# EAGLE board 04B-357-A1-01 (EAGLE 9.6.2)
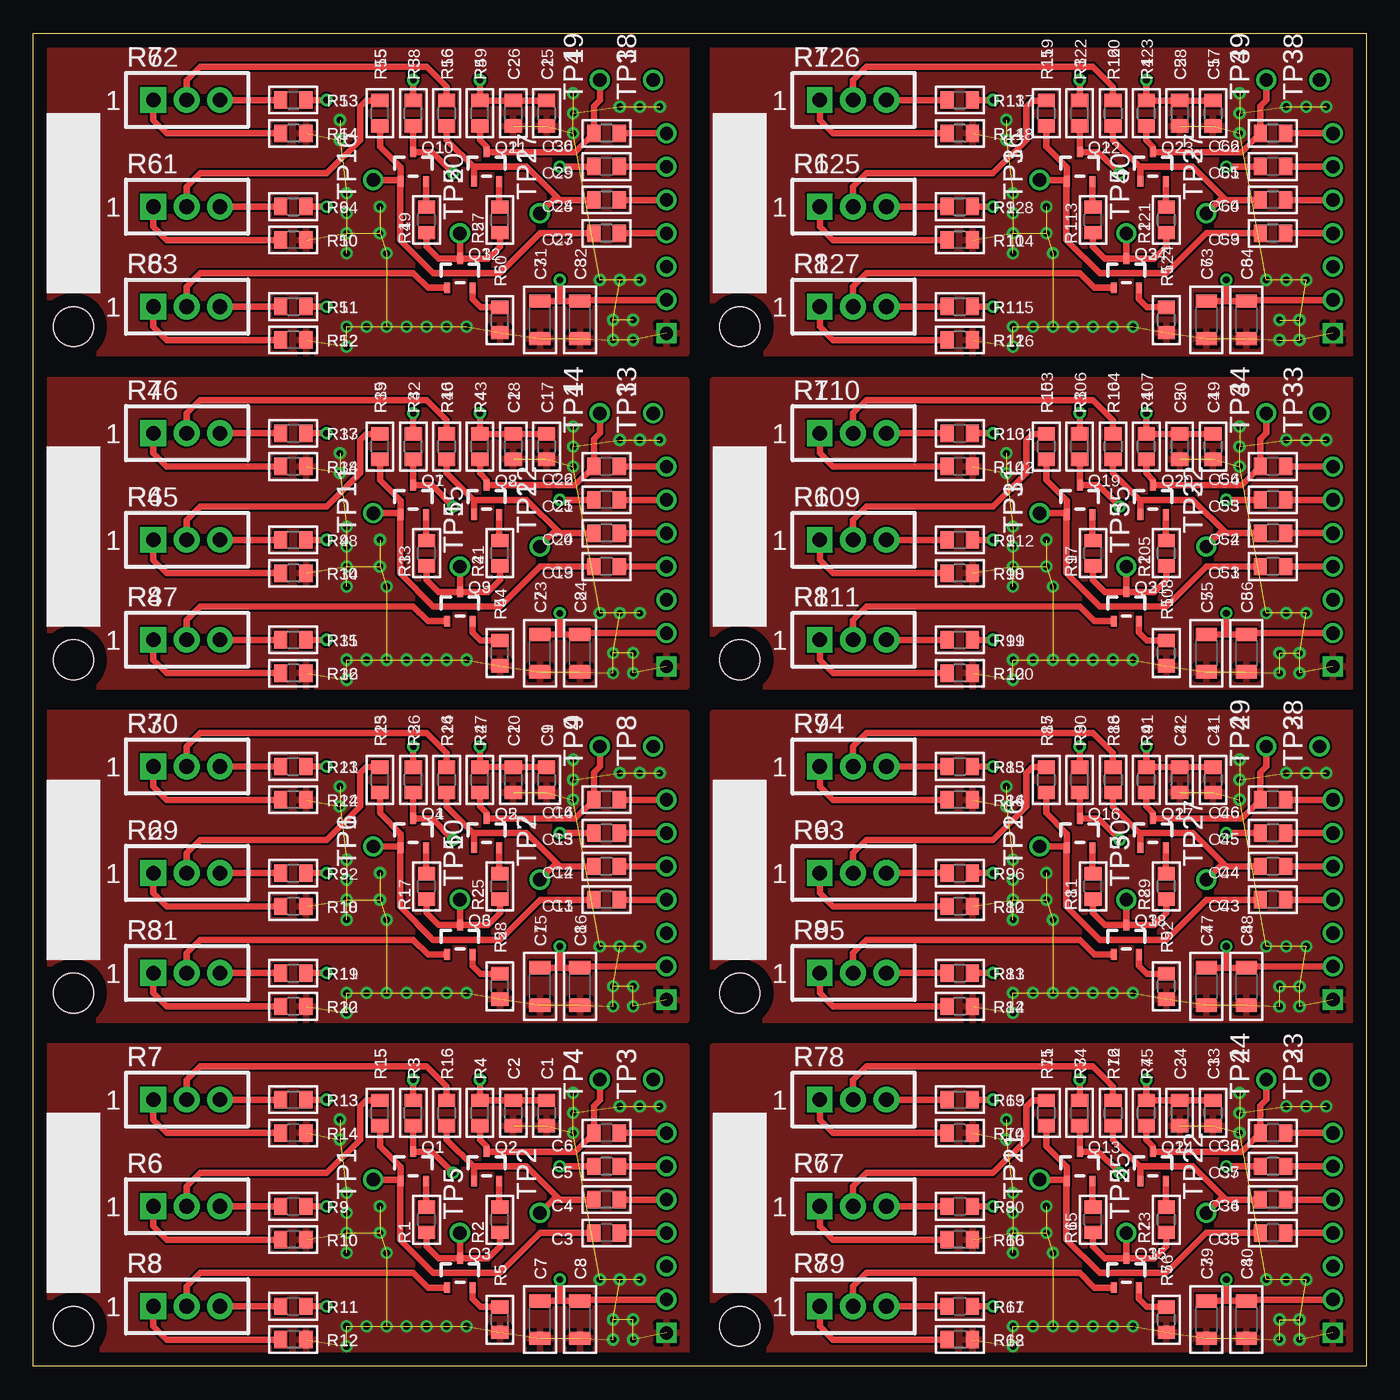
[diagram p0: board, top side]
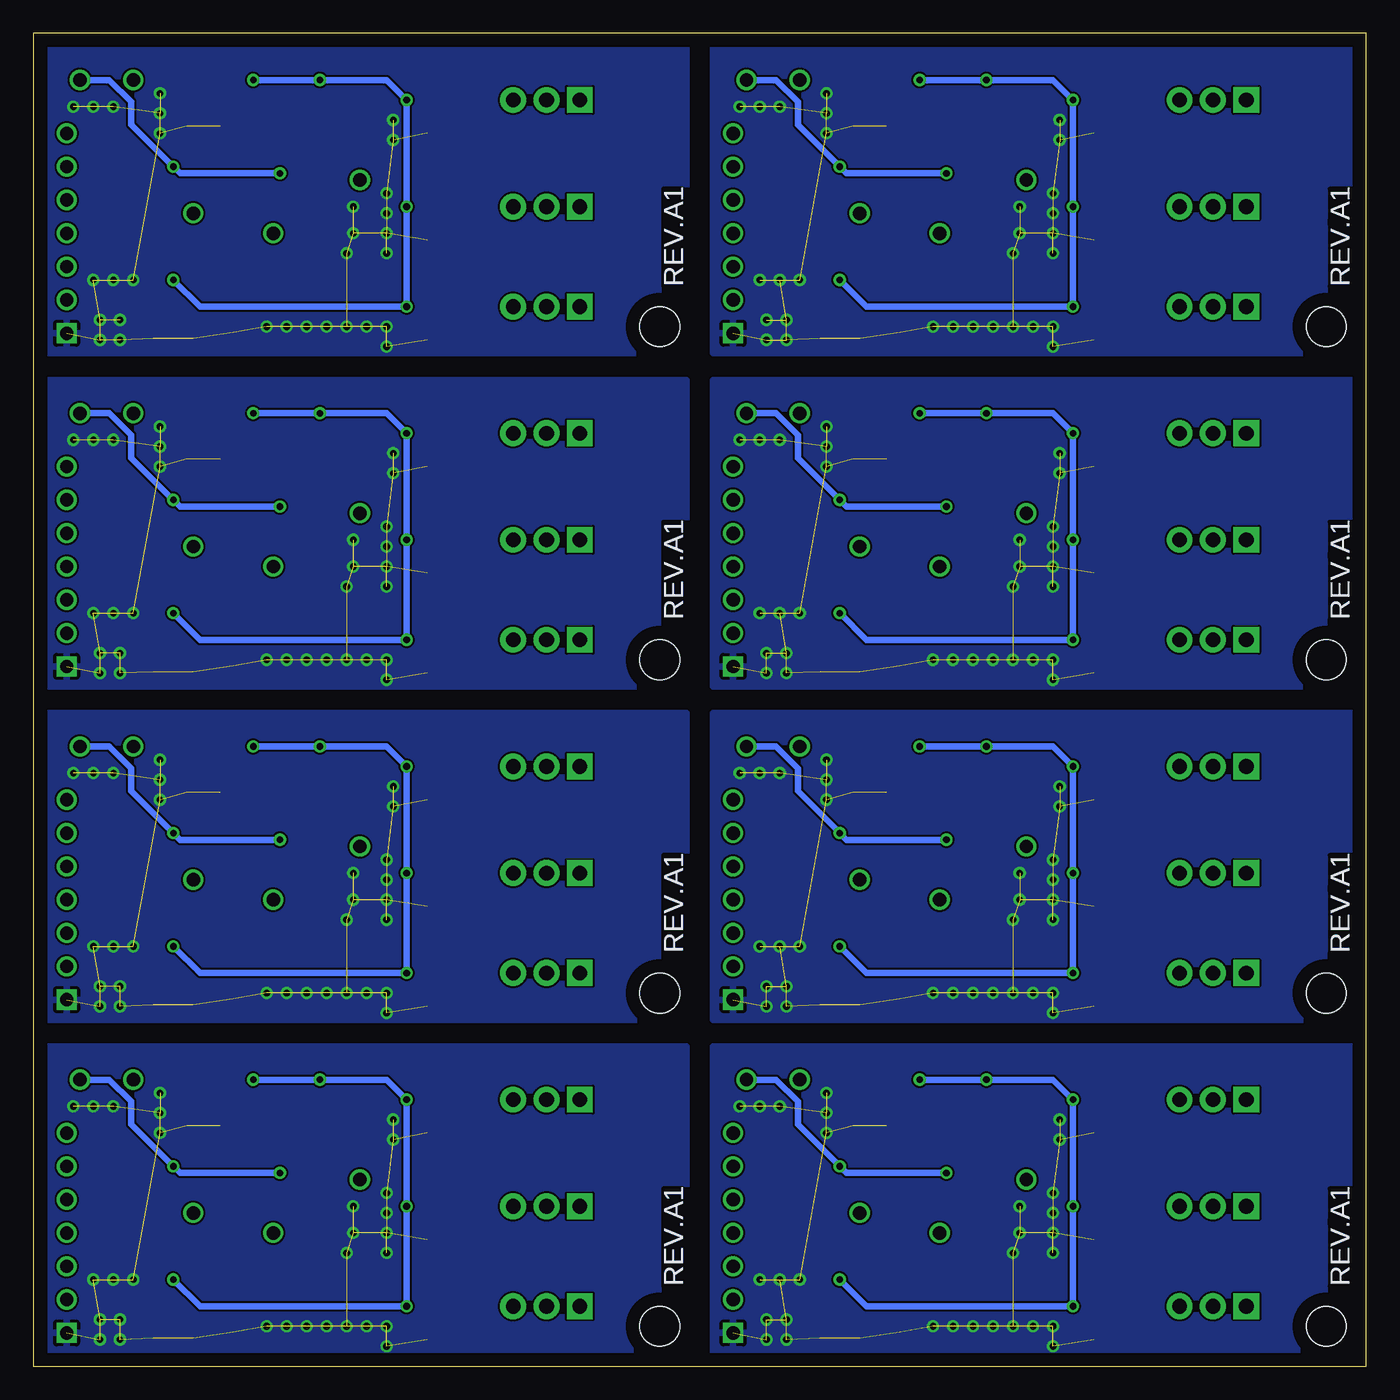
[diagram p1: board, bottom side, seen from below]

Size 100 x 100 mm. Coordinates in mm from the lower left corner, seen from the top.
Outline: 0,0 0,100 100,100 100,0 0,0
Copper layers (1*16): Top 0.035mm / dielectric 1.5mm / Bottom 0.035mm
Design rules "default": minimum track width 6mil, minimum drill 0.35mm, track to track 6mil, track to pad 6mil, pad to pad 6mil, via to via 6mil, smd to smd 6mil, copper to edge 40mil, drill to drill 6mil, minimum pad ring 10mil, minimum via ring 8mil, stop-mask expansion 4mil, vias tented up to drill 0mil, thermal gap 10mil

## Footprints (pad centres in the part's own frame; a part is rotated, then mirrored left to right if it is on the bottom)
C0805 = smd 1 x 1.3: 1 -0.95,0; 2 0.95,0
C1206 = smd 1 x 1.6: + -1.4,0; - 1.4,0
PINS_1X7 = drill 1 square: 1 0,0 | drill 1: 2 2.5,0; 3 5,0; 4 7.5,0; 5 10,0; 6 12.5,0; 7 15,0
MINIPCB_0P_25X50 = hole 3: 3,3
SOT23 = smd 0.45 x 0.8: 1 -0.95,-1.1; 2 0.95,-1.1; 3 0,1.1
R0805 = smd 1 x 1.3: 1 -0.95,0; 2 0.95,0
TRIM_0100 = drill 1.1 pad 1.93 square: 1 0,0 | drill 1.1 pad 1.93: 2 2.5,0; 3 5,0
PINS_1_TESTPOINT_KE5000_NOTEXT = drill 1: 1 0,0

## Placement (x,y rotation side)
C1  [C0805]  38.5,19 270 top
C2  [C0805]  36,19 270 top
C3  [C0805]  43,10 180 top
C4  [C0805]  43,12.5 180 top
C5  [C0805]  43,15 180 top
C6  [C0805]  43,17.5 180 top
C7  [C1206]  38,3.5 270 top
C8  [C1206]  41,3.5 270 top
C9  [C0805]  38.5,44 270 top
C10  [C0805]  36,44 270 top
C11  [C0805]  43,35 180 top
C12  [C0805]  43,37.5 180 top
C13  [C0805]  43,40 180 top
C14  [C0805]  43,42.5 180 top
C15  [C1206]  38,28.5 270 top
C16  [C1206]  41,28.5 270 top
C17  [C0805]  38.5,69 270 top
C18  [C0805]  36,69 270 top
C19  [C0805]  43,60 180 top
C20  [C0805]  43,62.5 180 top
C21  [C0805]  43,65 180 top
C22  [C0805]  43,67.5 180 top
C23  [C1206]  38,53.5 270 top
C24  [C1206]  41,53.5 270 top
C25  [C0805]  38.5,94 270 top
C26  [C0805]  36,94 270 top
C27  [C0805]  43,85 180 top
C28  [C0805]  43,87.5 180 top
C29  [C0805]  43,90 180 top
C30  [C0805]  43,92.5 180 top
C31  [C1206]  38,78.5 270 top
C32  [C1206]  41,78.5 270 top
C33  [C0805]  88.5,19 270 top
C34  [C0805]  86,19 270 top
C35  [C0805]  93,10 180 top
C36  [C0805]  93,12.5 180 top
C37  [C0805]  93,15 180 top
C38  [C0805]  93,17.5 180 top
C39  [C1206]  88,3.5 270 top
C40  [C1206]  91,3.5 270 top
C41  [C0805]  88.5,44 270 top
C42  [C0805]  86,44 270 top
C43  [C0805]  93,35 180 top
C44  [C0805]  93,37.5 180 top
C45  [C0805]  93,40 180 top
C46  [C0805]  93,42.5 180 top
C47  [C1206]  88,28.5 270 top
C48  [C1206]  91,28.5 270 top
C49  [C0805]  88.5,69 270 top
C50  [C0805]  86,69 270 top
C51  [C0805]  93,60 180 top
C52  [C0805]  93,62.5 180 top
C53  [C0805]  93,65 180 top
C54  [C0805]  93,67.5 180 top
C55  [C1206]  88,53.5 270 top
C56  [C1206]  91,53.5 270 top
C57  [C0805]  88.5,94 270 top
C58  [C0805]  86,94 270 top
C59  [C0805]  93,85 180 top
C60  [C0805]  93,87.5 180 top
C61  [C0805]  93,90 180 top
C62  [C0805]  93,92.5 180 top
C63  [C1206]  88,78.5 270 top
C64  [C1206]  91,78.5 270 top
P1  [PINS_1X7]  47.5,2.5 90 top
P2  [PINS_1X7]  47.5,27.5 90 top
P3  [PINS_1X7]  47.5,52.5 90 top
P4  [PINS_1X7]  47.5,77.5 90 top
P5  [PINS_1X7]  97.5,2.5 90 top
P6  [PINS_1X7]  97.5,27.5 90 top
P7  [PINS_1X7]  97.5,52.5 90 top
P8  [PINS_1X7]  97.5,77.5 90 top
PCB1  [MINIPCB_0P_25X50]  0,0 0 top
PCB2  [MINIPCB_0P_25X50]  0,25 0 top
PCB3  [MINIPCB_0P_25X50]  0,50 0 top
PCB4  [MINIPCB_0P_25X50]  0,75 0 top
PCB5  [MINIPCB_0P_25X50]  50,0 0 top
PCB6  [MINIPCB_0P_25X50]  50,25 0 top
PCB7  [MINIPCB_0P_25X50]  50,50 0 top
PCB8  [MINIPCB_0P_25X50]  50,75 0 top
Q1  [SOT23]  28.5,15 0 top
Q2  [SOT23]  34,15 0 top
Q3  [SOT23]  32,7 0 top
Q4  [SOT23]  28.5,40 0 top
Q5  [SOT23]  34,40 0 top
Q6  [SOT23]  32,32 0 top
Q7  [SOT23]  28.5,65 0 top
Q8  [SOT23]  34,65 0 top
Q9  [SOT23]  32,57 0 top
Q10  [SOT23]  28.5,90 0 top
Q11  [SOT23]  34,90 0 top
Q12  [SOT23]  32,82 0 top
Q13  [SOT23]  78.5,15 0 top
Q14  [SOT23]  84,15 0 top
Q15  [SOT23]  82,7 0 top
Q16  [SOT23]  78.5,40 0 top
Q17  [SOT23]  84,40 0 top
Q18  [SOT23]  82,32 0 top
Q19  [SOT23]  78.5,65 0 top
Q20  [SOT23]  84,65 0 top
Q21  [SOT23]  82,57 0 top
Q22  [SOT23]  78.5,90 0 top
Q23  [SOT23]  84,90 0 top
Q24  [SOT23]  82,82 0 top
R1  100  [R0805]  29.5,11 90 top
R2  100  [R0805]  35,11 90 top
R3  15k  [R0805]  28.5,19 90 top
R4  15k  [R0805]  33.5,19 90 top
R5  [R0805]  35,3.5 90 top
R6  [TRIM_0100]  9,12 0 top
R7  [TRIM_0100]  9,20 0 top
R8  [TRIM_0100]  9,4.5 0 top
R9  15k  [R0805]  19.5,12 0 top
R10  15k  [R0805]  19.5,9.5 180 top
R11  15k  [R0805]  19.5,4.5 0 top
R12  15k  [R0805]  19.5,2 180 top
R13  15k  [R0805]  19.5,20 0 top
R14  15k  [R0805]  19.5,17.5 180 top
R15  15k  [R0805]  26,19 90 top
R16  15k  [R0805]  31,19 270 top
R17  100  [R0805]  29.5,36 90 top
R18  15k  [R0805]  19.5,34.5 180 top
R19  15k  [R0805]  19.5,29.5 0 top
R20  15k  [R0805]  19.5,27 180 top
R21  15k  [R0805]  19.5,45 0 top
R22  15k  [R0805]  19.5,42.5 180 top
R23  15k  [R0805]  26,44 90 top
R24  15k  [R0805]  31,44 270 top
R25  100  [R0805]  35,36 90 top
R26  15k  [R0805]  28.5,44 90 top
R27  15k  [R0805]  33.5,44 90 top
R28  [R0805]  35,28.5 90 top
R29  [TRIM_0100]  9,37 0 top
R30  [TRIM_0100]  9,45 0 top
R31  [TRIM_0100]  9,29.5 0 top
R32  15k  [R0805]  19.5,37 0 top
R33  100  [R0805]  29.5,61 90 top
R34  15k  [R0805]  19.5,59.5 180 top
R35  15k  [R0805]  19.5,54.5 0 top
R36  15k  [R0805]  19.5,52 180 top
R37  15k  [R0805]  19.5,70 0 top
R38  15k  [R0805]  19.5,67.5 180 top
R39  15k  [R0805]  26,69 90 top
R40  15k  [R0805]  31,69 270 top
R41  100  [R0805]  35,61 90 top
R42  15k  [R0805]  28.5,69 90 top
R43  15k  [R0805]  33.5,69 90 top
R44  [R0805]  35,53.5 90 top
R45  [TRIM_0100]  9,62 0 top
R46  [TRIM_0100]  9,70 0 top
R47  [TRIM_0100]  9,54.5 0 top
R48  15k  [R0805]  19.5,62 0 top
R49  100  [R0805]  29.5,86 90 top
R50  15k  [R0805]  19.5,84.5 180 top
R51  15k  [R0805]  19.5,79.5 0 top
R52  15k  [R0805]  19.5,77 180 top
R53  15k  [R0805]  19.5,95 0 top
R54  15k  [R0805]  19.5,92.5 180 top
R55  15k  [R0805]  26,94 90 top
R56  15k  [R0805]  31,94 270 top
R57  100  [R0805]  35,86 90 top
R58  15k  [R0805]  28.5,94 90 top
R59  15k  [R0805]  33.5,94 90 top
R60  [R0805]  35,78.5 90 top
R61  [TRIM_0100]  9,87 0 top
R62  [TRIM_0100]  9,95 0 top
R63  [TRIM_0100]  9,79.5 0 top
R64  15k  [R0805]  19.5,87 0 top
R65  100  [R0805]  79.5,11 90 top
R66  15k  [R0805]  69.5,9.5 180 top
R67  15k  [R0805]  69.5,4.5 0 top
R68  15k  [R0805]  69.5,2 180 top
R69  15k  [R0805]  69.5,20 0 top
R70  15k  [R0805]  69.5,17.5 180 top
R71  15k  [R0805]  76,19 90 top
R72  15k  [R0805]  81,19 270 top
R73  100  [R0805]  85,11 90 top
R74  15k  [R0805]  78.5,19 90 top
R75  15k  [R0805]  83.5,19 90 top
R76  [R0805]  85,3.5 90 top
R77  [TRIM_0100]  59,12 0 top
R78  [TRIM_0100]  59,20 0 top
R79  [TRIM_0100]  59,4.5 0 top
R80  15k  [R0805]  69.5,12 0 top
R81  100  [R0805]  79.5,36 90 top
R82  15k  [R0805]  69.5,34.5 180 top
R83  15k  [R0805]  69.5,29.5 0 top
R84  15k  [R0805]  69.5,27 180 top
R85  15k  [R0805]  69.5,45 0 top
R86  15k  [R0805]  69.5,42.5 180 top
R87  15k  [R0805]  76,44 90 top
R88  15k  [R0805]  81,44 270 top
R89  100  [R0805]  85,36 90 top
R90  15k  [R0805]  78.5,44 90 top
R91  15k  [R0805]  83.5,44 90 top
R92  [R0805]  85,28.5 90 top
R93  [TRIM_0100]  59,37 0 top
R94  [TRIM_0100]  59,45 0 top
R95  [TRIM_0100]  59,29.5 0 top
R96  15k  [R0805]  69.5,37 0 top
R97  100  [R0805]  79.5,61 90 top
R98  15k  [R0805]  69.5,59.5 180 top
R99  15k  [R0805]  69.5,54.5 0 top
R100  15k  [R0805]  69.5,52 180 top
R101  15k  [R0805]  69.5,70 0 top
R102  15k  [R0805]  69.5,67.5 180 top
R103  15k  [R0805]  76,69 90 top
R104  15k  [R0805]  81,69 270 top
R105  100  [R0805]  85,61 90 top
R106  15k  [R0805]  78.5,69 90 top
R107  15k  [R0805]  83.5,69 90 top
R108  [R0805]  85,53.5 90 top
R109  [TRIM_0100]  59,62 0 top
R110  [TRIM_0100]  59,70 0 top
R111  [TRIM_0100]  59,54.5 0 top
R112  15k  [R0805]  69.5,62 0 top
R113  100  [R0805]  79.5,86 90 top
R114  15k  [R0805]  69.5,84.5 180 top
R115  15k  [R0805]  69.5,79.5 0 top
R116  15k  [R0805]  69.5,77 180 top
R117  15k  [R0805]  69.5,95 0 top
R118  15k  [R0805]  69.5,92.5 180 top
R119  15k  [R0805]  76,94 90 top
R120  15k  [R0805]  81,94 270 top
R121  100  [R0805]  85,86 90 top
R122  15k  [R0805]  78.5,94 90 top
R123  15k  [R0805]  83.5,94 90 top
R124  [R0805]  85,78.5 90 top
R125  [TRIM_0100]  59,87 0 top
R126  [TRIM_0100]  59,95 0 top
R127  [TRIM_0100]  59,79.5 0 top
R128  15k  [R0805]  69.5,87 0 top
TP1  [PINS_1_TESTPOINT_KE5000_NOTEXT]  25.5,14 90 top
TP2  [PINS_1_TESTPOINT_KE5000_NOTEXT]  38,11.5 0 top
TP3  [PINS_1_TESTPOINT_KE5000_NOTEXT]  46.5,21.5 90 top
TP4  [PINS_1_TESTPOINT_KE5000_NOTEXT]  42.5,21.5 90 top
TP5  [PINS_1_TESTPOINT_KE5000_NOTEXT]  32,10 90 top
TP6  [PINS_1_TESTPOINT_KE5000_NOTEXT]  25.5,39 90 top
TP7  [PINS_1_TESTPOINT_KE5000_NOTEXT]  38,36.5 0 top
TP8  [PINS_1_TESTPOINT_KE5000_NOTEXT]  46.5,46.5 90 top
TP9  [PINS_1_TESTPOINT_KE5000_NOTEXT]  42.5,46.5 90 top
TP10  [PINS_1_TESTPOINT_KE5000_NOTEXT]  32,35 90 top
TP11  [PINS_1_TESTPOINT_KE5000_NOTEXT]  25.5,64 90 top
TP12  [PINS_1_TESTPOINT_KE5000_NOTEXT]  38,61.5 0 top
TP13  [PINS_1_TESTPOINT_KE5000_NOTEXT]  46.5,71.5 90 top
TP14  [PINS_1_TESTPOINT_KE5000_NOTEXT]  42.5,71.5 90 top
TP15  [PINS_1_TESTPOINT_KE5000_NOTEXT]  32,60 90 top
TP16  [PINS_1_TESTPOINT_KE5000_NOTEXT]  25.5,89 90 top
TP17  [PINS_1_TESTPOINT_KE5000_NOTEXT]  38,86.5 0 top
TP18  [PINS_1_TESTPOINT_KE5000_NOTEXT]  46.5,96.5 90 top
TP19  [PINS_1_TESTPOINT_KE5000_NOTEXT]  42.5,96.5 90 top
TP20  [PINS_1_TESTPOINT_KE5000_NOTEXT]  32,85 90 top
TP21  [PINS_1_TESTPOINT_KE5000_NOTEXT]  75.5,14 90 top
TP22  [PINS_1_TESTPOINT_KE5000_NOTEXT]  88,11.5 0 top
TP23  [PINS_1_TESTPOINT_KE5000_NOTEXT]  96.5,21.5 90 top
TP24  [PINS_1_TESTPOINT_KE5000_NOTEXT]  92.5,21.5 90 top
TP25  [PINS_1_TESTPOINT_KE5000_NOTEXT]  82,10 90 top
TP26  [PINS_1_TESTPOINT_KE5000_NOTEXT]  75.5,39 90 top
TP27  [PINS_1_TESTPOINT_KE5000_NOTEXT]  88,36.5 0 top
TP28  [PINS_1_TESTPOINT_KE5000_NOTEXT]  96.5,46.5 90 top
TP29  [PINS_1_TESTPOINT_KE5000_NOTEXT]  92.5,46.5 90 top
TP30  [PINS_1_TESTPOINT_KE5000_NOTEXT]  82,35 90 top
TP31  [PINS_1_TESTPOINT_KE5000_NOTEXT]  75.5,64 90 top
TP32  [PINS_1_TESTPOINT_KE5000_NOTEXT]  88,61.5 0 top
TP33  [PINS_1_TESTPOINT_KE5000_NOTEXT]  96.5,71.5 90 top
TP34  [PINS_1_TESTPOINT_KE5000_NOTEXT]  92.5,71.5 90 top
TP35  [PINS_1_TESTPOINT_KE5000_NOTEXT]  82,60 90 top
TP36  [PINS_1_TESTPOINT_KE5000_NOTEXT]  75.5,89 90 top
TP37  [PINS_1_TESTPOINT_KE5000_NOTEXT]  88,86.5 0 top
TP38  [PINS_1_TESTPOINT_KE5000_NOTEXT]  96.5,96.5 90 top
TP39  [PINS_1_TESTPOINT_KE5000_NOTEXT]  92.5,96.5 90 top
TP40  [PINS_1_TESTPOINT_KE5000_NOTEXT]  82,85 90 top

## Library data of the parts
C1-C64 P1-P8 Q1-Q24 R1-R128 TP1-TP40 = minipcb
PCB1-PCB8 = minipcb; REVISION: A1

## Nets
GND: C1.2 C2.2 C7.- C8.- P1.1 R5.1 R10.1 R12.1 R14.1
GND1: C9.2 C10.2 C15.- C16.- P2.1 R18.1 R20.1 R22.1 R28.1
GND2: C17.2 C18.2 C23.- C24.- P3.1 R34.1 R36.1 R38.1 R44.1
GND3: C25.2 C26.2 C31.- C32.- P4.1 R50.1 R52.1 R54.1 R60.1
GND4: C33.2 C34.2 C39.- C40.- P5.1 R66.1 R68.1 R70.1 R76.1
GND5: C41.2 C42.2 C47.- C48.- P6.1 R82.1 R84.1 R86.1 R92.1
GND6: C49.2 C50.2 C55.- C56.- P7.1 R98.1 R100.1 R102.1 R108.1
GND7: C57.2 C58.2 C63.- C64.- P8.1 R114.1 R116.1 R118.1 R124.1
N$1: Q3.3 R1.1 R2.1 TP5.1
N$2: C5.2 Q1.3 R3.1 TP3.1
N$3: Q1.2 R1.2
N$4: Q2.2 R2.2
N$5: C6.2 Q2.3 R4.1 TP4.1
N$6: Q3.2 R5.2
N$7: R8.3 R11.1
N$8: R8.1 R12.2
N$9: Q3.1 R8.2
N$10: C3.2 Q1.1 R15.1 TP1.1
N$11: C4.2 Q2.1 R16.2 TP2.1
N$12: R7.3 R13.1
N$13: R7.1 R14.2
N$14: R6.3 R9.1
N$15: R6.1 R10.2
N$16: R6.2 R15.2
N$17: R7.2 R16.1
N$18: C3.1 P1.4
N$19: C4.1 P1.5
N$20: C5.1 P1.6
N$21: C6.1 P1.7
N$22: Q6.3 R17.1 R25.1 TP10.1
N$23: C13.2 Q4.3 R26.1 TP8.1
N$24: Q4.2 R17.2
N$25: Q5.2 R25.2
N$26: C14.2 Q5.3 R27.1 TP9.1
N$27: Q6.2 R28.2
N$28: R19.1 R31.3
N$29: R20.2 R31.1
N$30: Q6.1 R31.2
N$31: C11.2 Q4.1 R23.1 TP6.1
N$32: C12.2 Q5.1 R24.2 TP7.1
N$33: R21.1 R30.3
N$34: R22.2 R30.1
N$35: R29.3 R32.1
N$36: R18.2 R29.1
N$37: R23.2 R29.2
N$38: R24.1 R30.2
N$39: C11.1 P2.4
N$40: C12.1 P2.5
N$41: C13.1 P2.6
N$42: C14.1 P2.7
N$43: Q9.3 R33.1 R41.1 TP15.1
N$44: C21.2 Q7.3 R42.1 TP13.1
N$45: Q7.2 R33.2
N$46: Q8.2 R41.2
N$47: C22.2 Q8.3 R43.1 TP14.1
N$48: Q9.2 R44.2
N$49: R35.1 R47.3
N$50: R36.2 R47.1
N$51: Q9.1 R47.2
N$52: C19.2 Q7.1 R39.1 TP11.1
N$53: C20.2 Q8.1 R40.2 TP12.1
N$54: R37.1 R46.3
N$55: R38.2 R46.1
N$56: R45.3 R48.1
N$57: R34.2 R45.1
N$58: R39.2 R45.2
N$59: R40.1 R46.2
N$60: C19.1 P3.4
N$61: C20.1 P3.5
N$62: C21.1 P3.6
N$63: C22.1 P3.7
N$64: Q12.3 R49.1 R57.1 TP20.1
N$65: C29.2 Q10.3 R58.1 TP18.1
N$66: Q10.2 R49.2
N$67: Q11.2 R57.2
N$68: C30.2 Q11.3 R59.1 TP19.1
N$69: Q12.2 R60.2
N$70: R51.1 R63.3
N$71: R52.2 R63.1
N$72: Q12.1 R63.2
N$73: C27.2 Q10.1 R55.1 TP16.1
N$74: C28.2 Q11.1 R56.2 TP17.1
N$75: R53.1 R62.3
N$76: R54.2 R62.1
N$77: R61.3 R64.1
N$78: R50.2 R61.1
N$79: R55.2 R61.2
N$80: R56.1 R62.2
N$81: C27.1 P4.4
N$82: C28.1 P4.5
N$83: C29.1 P4.6
N$84: C30.1 P4.7
N$85: Q15.3 R65.1 R73.1 TP25.1
N$86: C37.2 Q13.3 R74.1 TP23.1
N$87: Q13.2 R65.2
N$88: Q14.2 R73.2
N$89: C38.2 Q14.3 R75.1 TP24.1
N$90: Q15.2 R76.2
N$91: R67.1 R79.3
N$92: R68.2 R79.1
N$93: Q15.1 R79.2
N$94: C35.2 Q13.1 R71.1 TP21.1
N$95: C36.2 Q14.1 R72.2 TP22.1
N$96: R69.1 R78.3
N$97: R70.2 R78.1
N$98: R77.3 R80.1
N$99: R66.2 R77.1
N$100: R71.2 R77.2
N$101: R72.1 R78.2
N$102: C35.1 P5.4
N$103: C36.1 P5.5
N$104: C37.1 P5.6
N$105: C38.1 P5.7
N$106: Q18.3 R81.1 R89.1 TP30.1
N$107: C45.2 Q16.3 R90.1 TP28.1
N$108: Q16.2 R81.2
N$109: Q17.2 R89.2
N$110: C46.2 Q17.3 R91.1 TP29.1
N$111: Q18.2 R92.2
N$112: R83.1 R95.3
N$113: R84.2 R95.1
N$114: Q18.1 R95.2
N$115: C43.2 Q16.1 R87.1 TP26.1
N$116: C44.2 Q17.1 R88.2 TP27.1
N$117: R85.1 R94.3
N$118: R86.2 R94.1
N$119: R93.3 R96.1
N$120: R82.2 R93.1
N$121: R87.2 R93.2
N$122: R88.1 R94.2
N$123: C43.1 P6.4
N$124: C44.1 P6.5
N$125: C45.1 P6.6
N$126: C46.1 P6.7
N$127: Q21.3 R97.1 R105.1 TP35.1
N$128: C53.2 Q19.3 R106.1 TP33.1
N$129: Q19.2 R97.2
N$130: Q20.2 R105.2
N$131: C54.2 Q20.3 R107.1 TP34.1
N$132: Q21.2 R108.2
N$133: R99.1 R111.3
N$134: R100.2 R111.1
N$135: Q21.1 R111.2
N$136: C51.2 Q19.1 R103.1 TP31.1
N$137: C52.2 Q20.1 R104.2 TP32.1
N$138: R101.1 R110.3
N$139: R102.2 R110.1
N$140: R109.3 R112.1
N$141: R98.2 R109.1
N$142: R103.2 R109.2
N$143: R104.1 R110.2
N$144: C51.1 P7.4
N$145: C52.1 P7.5
N$146: C53.1 P7.6
N$147: C54.1 P7.7
N$148: Q24.3 R113.1 R121.1 TP40.1
N$149: C61.2 Q22.3 R122.1 TP38.1
N$150: Q22.2 R113.2
N$151: Q23.2 R121.2
N$152: C62.2 Q23.3 R123.1 TP39.1
N$153: Q24.2 R124.2
N$154: R115.1 R127.3
N$155: R116.2 R127.1
N$156: Q24.1 R127.2
N$157: C59.2 Q22.1 R119.1 TP36.1
N$158: C60.2 Q23.1 R120.2 TP37.1
N$159: R117.1 R126.3
N$160: R118.2 R126.1
N$161: R125.3 R128.1
N$162: R114.2 R125.1
N$163: R119.2 R125.2
N$164: R120.1 R126.2
N$165: C59.1 P8.4
N$166: C60.1 P8.5
N$167: C61.1 P8.6
N$168: C62.1 P8.7
V+: C1.1 C2.1 C7.+ C8.+ P1.2 R3.2 R4.2 R9.2 R11.2 R13.2
V+1: C9.1 C10.1 C15.+ C16.+ P2.2 R19.2 R21.2 R26.2 R27.2 R32.2
V+2: C17.1 C18.1 C23.+ C24.+ P3.2 R35.2 R37.2 R42.2 R43.2 R48.2
V+3: C25.1 C26.1 C31.+ C32.+ P4.2 R51.2 R53.2 R58.2 R59.2 R64.2
V+4: C33.1 C34.1 C39.+ C40.+ P5.2 R67.2 R69.2 R74.2 R75.2 R80.2
V+5: C41.1 C42.1 C47.+ C48.+ P6.2 R83.2 R85.2 R90.2 R91.2 R96.2
V+6: C49.1 C50.1 C55.+ C56.+ P7.2 R99.2 R101.2 R106.2 R107.2 R112.2
V+7: C57.1 C58.1 C63.+ C64.+ P8.2 R115.2 R117.2 R122.2 R123.2 R128.2

## Tracks (layer width: path | path; a pad name or v marks a point on that pad's centre or on a via)
GND  (via drill 0.5)  (38 unrouted)
  other vias: 40.5,17.5 40.5,19 40.5,20.5 23,18.5 23,17 23.5,11.5 23.5,10 23.5,8.5 23.5,3 23.5,1.5 25,3 26.5,3 28,3 29.5,3 31,3 32.5,3 43.5,3.5 43.5,2 45,3.5 45,2 45.5,6.5 44,6.5 42.5,6.5 26,12 26,10 26.5,8.5 23.5,13 44,19.5 45.5,19.5 47,19.5
  pour Top: 1,1 49,1 49,24 1,24
  pour Bottom: 1,1 49,1 49,24 1,24
GND1  (via drill 0.5)  (38 unrouted)
  other vias: 40.5,42.5 40.5,44 40.5,45.5 23,43.5 23,42 23.5,36.5 23.5,35 23.5,33.5 23.5,28 23.5,26.5 25,28 26.5,28 28,28 29.5,28 31,28 32.5,28 43.5,28.5 43.5,27 45,28.5 45,27 45.5,31.5 44,31.5 42.5,31.5 26,37 26,35 26.5,33.5 23.5,38 44,44.5 45.5,44.5 47,44.5
  pour Top: 1,26 49,26 49,49 1,49
  pour Bottom: 1,26 49,26 49,49 1,49
GND2  (via drill 0.5)  (38 unrouted)
  other vias: 40.5,67.5 40.5,69 40.5,70.5 23,68.5 23,67 23.5,61.5 23.5,60 23.5,58.5 23.5,53 23.5,51.5 25,53 26.5,53 28,53 29.5,53 31,53 32.5,53 43.5,53.5 43.5,52 45,53.5 45,52 45.5,56.5 44,56.5 42.5,56.5 26,62 26,60 26.5,58.5 23.5,63 44,69.5 45.5,69.5 47,69.5
  pour Top: 1,51 49,51 49,74 1,74
  pour Bottom: 1,51 49,51 49,74 1,74
GND3  (via drill 0.5)  (38 unrouted)
  other vias: 40.5,92.5 40.5,94 40.5,95.5 23,93.5 23,92 23.5,86.5 23.5,85 23.5,83.5 23.5,78 23.5,76.5 25,78 26.5,78 28,78 29.5,78 31,78 32.5,78 43.5,78.5 43.5,77 45,78.5 45,77 45.5,81.5 44,81.5 42.5,81.5 26,87 26,85 26.5,83.5 23.5,88 44,94.5 45.5,94.5 47,94.5
  pour Top: 1,76 49,76 49,99 1,99
  pour Bottom: 1,76 49,76 49,99 1,99
GND4  (via drill 0.5)  (38 unrouted)
  other vias: 90.5,17.5 90.5,19 90.5,20.5 73,18.5 73,17 73.5,11.5 73.5,10 73.5,8.5 73.5,3 73.5,1.5 75,3 76.5,3 78,3 79.5,3 81,3 82.5,3 93.5,3.5 93.5,2 95,3.5 95,2 95.5,6.5 94,6.5 92.5,6.5 76,12 76,10 76.5,8.5 73.5,13 94,19.5 95.5,19.5 97,19.5
  pour Top: 51,1 99,1 99,24 51,24
  pour Bottom: 51,1 99,1 99,24 51,24
GND5  (via drill 0.5)  (38 unrouted)
  other vias: 90.5,42.5 90.5,44 90.5,45.5 73,43.5 73,42 73.5,36.5 73.5,35 73.5,33.5 73.5,28 73.5,26.5 75,28 76.5,28 78,28 79.5,28 81,28 82.5,28 93.5,28.5 93.5,27 95,28.5 95,27 95.5,31.5 94,31.5 92.5,31.5 76,37 76,35 76.5,33.5 73.5,38 94,44.5 95.5,44.5 97,44.5
  pour Top: 51,26 99,26 99,49 51,49
  pour Bottom: 51,26 99,26 99,49 51,49
GND6  (via drill 0.5)  (38 unrouted)
  other vias: 90.5,67.5 90.5,69 90.5,70.5 73,68.5 73,67 73.5,61.5 73.5,60 73.5,58.5 73.5,53 73.5,51.5 75,53 76.5,53 78,53 79.5,53 81,53 82.5,53 93.5,53.5 93.5,52 95,53.5 95,52 95.5,56.5 94,56.5 92.5,56.5 76,62 76,60 76.5,58.5 73.5,63 94,69.5 95.5,69.5 97,69.5
  pour Top: 51,51 99,51 99,74 51,74
  pour Bottom: 51,51 99,51 99,74 51,74
GND7  (via drill 0.5)  (38 unrouted)
  other vias: 90.5,92.5 90.5,94 90.5,95.5 73,93.5 73,92 73.5,86.5 73.5,85 73.5,83.5 73.5,78 73.5,76.5 75,78 76.5,78 78,78 79.5,78 81,78 82.5,78 93.5,78.5 93.5,77 95,78.5 95,77 95.5,81.5 94,81.5 92.5,81.5 76,87 76,85 76.5,83.5 73.5,88 94,94.5 95.5,94.5 97,94.5
  pour Top: 51,76 99,76 99,99 51,99
  pour Bottom: 51,76 99,76 99,99 51,99
N$1
  Top 0.5: R1.1 29.5,9 30.4,8.1 Q3.3 | R2.1 35,9 34.1,8.1 Q3.3 | Q3.3 TP5.1
N$2  (via drill 0.5)
  Top 0.5: R3.1 Q1.3 29.9,16.1 v31.5,14.5 | C5.2 v39.5,15
  Bottom 0.5: v31.5,14.5 39,14.5 v39.5,15 42.64,18.14 42.64,19.85 44.29,21.5 TP3.1
N$3
  Top 0.5: R1.2 29.45,12 Q1.2
N$4
  Top 0.5: R2.2 34.95,12 Q2.2
N$5
  Top 0.5: R4.1 33.5,17 34,16.5 Q2.3 40.65,16.1 C6.2 42.05,19.55 42.5,20 TP4.1
N$6
  Top 0.5: Q3.2 32.95,5.05 33.55,4.45 R5.2
N$7
  Top 0.5: R11.1 R8.3
N$8
  Top 0.5: R12.2 10,2 9,3 R8.1
N$9
  Top 0.5: R8.2 11.5,6 12.5,7 28.5,7 29.6,5.9 Q3.1
N$10
  Top 0.5: R15.1 26,16.5 27.55,14.95 Q1.1 27.5,13.85 | C3.2 38,10 35,7 30,7 27.5,9.5 27.5,13.85 | TP1.1 27.35,14 27.5,13.85
N$11
  Top 0.5: Q2.1 33.05,14.95 | R16.2 31,17 33.05,14.95 | C4.2 39.5,12.5 | 39.5,12.5 37,15 33.1,15 33.05,14.95 | TP2.1 39,12.5 39.5,12.5
N$12
  Top 0.5: R7.3 R13.1
N$13
  Top 0.5: R14.2 10,17.5 9,18.5 R7.1
N$14
  Top 0.5: R6.3 R9.1
N$15
  Top 0.5: R10.2 10,9.5 9,10.5 R6.1
N$16
  Top 0.5: R6.2 11.5,13.5 12.5,14.5 22,14.5 24.5,17 24.5,19.5 24.95,19.95 R15.2
N$17
  Top 0.5: R7.2 11.5,21.5 12.5,22.5 29.5,22.5 31,21 R16.1
N$18
  Top 0.5: C3.1 P1.4
N$19
  Top 0.5: C4.1 P1.5
N$20
  Top 0.5: C5.1 P1.6
N$21
  Top 0.5: C6.1 P1.7
N$22
  Top 0.5: R17.1 29.5,34 30.4,33.1 Q6.3 | R25.1 35,34 34.1,33.1 Q6.3 | Q6.3 TP10.1
N$23  (via drill 0.5)
  Top 0.5: R26.1 Q4.3 29.9,41.1 v31.5,39.5 | C13.2 v39.5,40
  Bottom 0.5: v31.5,39.5 39,39.5 v39.5,40 42.64,43.14 42.64,44.85 44.29,46.5 TP8.1
N$24
  Top 0.5: R17.2 29.45,37 Q4.2
N$25
  Top 0.5: R25.2 34.95,37 Q5.2
N$26
  Top 0.5: R27.1 33.5,42 34,41.5 Q5.3 40.65,41.1 C14.2 42.05,44.55 42.5,45 TP9.1
N$27
  Top 0.5: Q6.2 32.95,30.05 33.55,29.45 R28.2
N$28
  Top 0.5: R19.1 R31.3
N$29
  Top 0.5: R20.2 10,27 9,28 R31.1
N$30
  Top 0.5: R31.2 11.5,31 12.5,32 28.5,32 29.6,30.9 Q6.1
N$31
  Top 0.5: R23.1 26,41.5 27.55,39.95 Q4.1 27.5,38.85 | C11.2 38,35 35,32 30,32 27.5,34.5 27.5,38.85 | TP6.1 27.35,39 27.5,38.85
N$32
  Top 0.5: Q5.1 33.05,39.95 | R24.2 31,42 33.05,39.95 | C12.2 39.5,37.5 | 39.5,37.5 37,40 33.1,40 33.05,39.95 | TP7.1 39,37.5 39.5,37.5
N$33
  Top 0.5: R30.3 R21.1
N$34
  Top 0.5: R22.2 10,42.5 9,43.5 R30.1
N$35
  Top 0.5: R29.3 R32.1
N$36
  Top 0.5: R18.2 10,34.5 9,35.5 R29.1
N$37
  Top 0.5: R29.2 11.5,38.5 12.5,39.5 22,39.5 24.5,42 24.5,44.5 24.95,44.95 R23.2
N$38
  Top 0.5: R30.2 11.5,46.5 12.5,47.5 29.5,47.5 31,46 R24.1
N$39
  Top 0.5: C11.1 P2.4
N$40
  Top 0.5: C12.1 P2.5
N$41
  Top 0.5: C13.1 P2.6
N$42
  Top 0.5: C14.1 P2.7
N$43
  Top 0.5: R33.1 29.5,59 30.4,58.1 Q9.3 | R41.1 35,59 34.1,58.1 Q9.3 | Q9.3 TP15.1
N$44  (via drill 0.5)
  Top 0.5: R42.1 Q7.3 29.9,66.1 v31.5,64.5 | C21.2 v39.5,65
  Bottom 0.5: v31.5,64.5 39,64.5 v39.5,65 42.64,68.14 42.64,69.85 44.29,71.5 TP13.1
N$45
  Top 0.5: R33.2 29.45,62 Q7.2
N$46
  Top 0.5: R41.2 34.95,62 Q8.2
N$47
  Top 0.5: R43.1 33.5,67 34,66.5 Q8.3 40.65,66.1 C22.2 42.05,69.55 42.5,70 TP14.1
N$48
  Top 0.5: Q9.2 32.95,55.05 33.55,54.45 R44.2
N$49
  Top 0.5: R35.1 R47.3
N$50
  Top 0.5: R36.2 10,52 9,53 R47.1
N$51
  Top 0.5: R47.2 11.5,56 12.5,57 28.5,57 29.6,55.9 Q9.1
N$52
  Top 0.5: R39.1 26,66.5 27.55,64.95 Q7.1 27.5,63.85 | C19.2 38,60 35,57 30,57 27.5,59.5 27.5,63.85 | TP11.1 27.35,64 27.5,63.85
N$53
  Top 0.5: Q8.1 33.05,64.95 | R40.2 31,67 33.05,64.95 | C20.2 39.5,62.5 | 39.5,62.5 37,65 33.1,65 33.05,64.95 | TP12.1 39,62.5 39.5,62.5
N$54
  Top 0.5: R46.3 R37.1
N$55
  Top 0.5: R38.2 10,67.5 9,68.5 R46.1
N$56
  Top 0.5: R45.3 R48.1
N$57
  Top 0.5: R34.2 10,59.5 9,60.5 R45.1
N$58
  Top 0.5: R45.2 11.5,63.5 12.5,64.5 22,64.5 24.5,67 24.5,69.5 24.95,69.95 R39.2
N$59
  Top 0.5: R46.2 11.5,71.5 12.5,72.5 29.5,72.5 31,71 R40.1
N$60
  Top 0.5: C19.1 P3.4
N$61
  Top 0.5: C20.1 P3.5
N$62
  Top 0.5: C21.1 P3.6
N$63
  Top 0.5: C22.1 P3.7
N$64
  Top 0.5: R49.1 29.5,84 30.4,83.1 Q12.3 | R57.1 35,84 34.1,83.1 Q12.3 | Q12.3 TP20.1
N$65  (via drill 0.5)
  Top 0.5: R58.1 Q10.3 29.9,91.1 v31.5,89.5 | C29.2 v39.5,90
  Bottom 0.5: v31.5,89.5 39,89.5 v39.5,90 42.64,93.14 42.64,94.85 44.29,96.5 TP18.1
N$66
  Top 0.5: R49.2 29.45,87 Q10.2
N$67
  Top 0.5: R57.2 34.95,87 Q11.2
N$68
  Top 0.5: R59.1 33.5,92 34,91.5 Q11.3 40.65,91.1 C30.2 42.05,94.55 42.5,95 TP19.1
N$69
  Top 0.5: Q12.2 32.95,80.05 33.55,79.45 R60.2
N$70
  Top 0.5: R51.1 R63.3
N$71
  Top 0.5: R52.2 10,77 9,78 R63.1
N$72
  Top 0.5: R63.2 11.5,81 12.5,82 28.5,82 29.6,80.9 Q12.1
N$73
  Top 0.5: R55.1 26,91.5 27.55,89.95 Q10.1 27.5,88.85 | C27.2 38,85 35,82 30,82 27.5,84.5 27.5,88.85 | TP16.1 27.35,89 27.5,88.85
N$74
  Top 0.5: Q11.1 33.05,89.95 | R56.2 31,92 33.05,89.95 | C28.2 39.5,87.5 | 39.5,87.5 37,90 33.1,90 33.05,89.95 | TP17.1 39,87.5 39.5,87.5
N$75
  Top 0.5: R62.3 R53.1
N$76
  Top 0.5: R54.2 10,92.5 9,93.5 R62.1
N$77
  Top 0.5: R61.3 R64.1
N$78
  Top 0.5: R50.2 10,84.5 9,85.5 R61.1
N$79
  Top 0.5: R61.2 11.5,88.5 12.5,89.5 22,89.5 24.5,92 24.5,94.5 24.95,94.95 R55.2
N$80
  Top 0.5: R62.2 11.5,96.5 12.5,97.5 29.5,97.5 31,96 R56.1
N$81
  Top 0.5: C27.1 P4.4
N$82
  Top 0.5: C28.1 P4.5
N$83
  Top 0.5: C29.1 P4.6
N$84
  Top 0.5: C30.1 P4.7
N$85
  Top 0.5: R65.1 79.5,9 80.4,8.1 Q15.3 | R73.1 85,9 84.1,8.1 Q15.3 | Q15.3 TP25.1
N$86  (via drill 0.5)
  Top 0.5: R74.1 Q13.3 79.9,16.1 v81.5,14.5 | C37.2 v89.5,15
  Bottom 0.5: v81.5,14.5 89,14.5 v89.5,15 92.64,18.14 92.64,19.85 94.29,21.5 TP23.1
N$87
  Top 0.5: R65.2 79.45,12 Q13.2
N$88
  Top 0.5: R73.2 84.95,12 Q14.2
N$89
  Top 0.5: R75.1 83.5,17 84,16.5 Q14.3 90.65,16.1 C38.2 92.05,19.55 92.5,20 TP24.1
N$90
  Top 0.5: Q15.2 82.95,5.05 83.55,4.45 R76.2
N$91
  Top 0.5: R67.1 R79.3
N$92
  Top 0.5: R68.2 60,2 59,3 R79.1
N$93
  Top 0.5: R79.2 61.5,6 62.5,7 78.5,7 79.6,5.9 Q15.1
N$94
  Top 0.5: R71.1 76,16.5 77.55,14.95 Q13.1 77.5,13.85 | C35.2 88,10 85,7 80,7 77.5,9.5 77.5,13.85 | TP21.1 77.35,14 77.5,13.85
N$95
  Top 0.5: Q14.1 83.05,14.95 | R72.2 81,17 83.05,14.95 | C36.2 89.5,12.5 | 89.5,12.5 87,15 83.1,15 83.05,14.95 | TP22.1 89,12.5 89.5,12.5
N$96
  Top 0.5: R78.3 R69.1
N$97
  Top 0.5: R70.2 60,17.5 59,18.5 R78.1
N$98
  Top 0.5: R77.3 R80.1
N$99
  Top 0.5: R66.2 60,9.5 59,10.5 R77.1
N$100
  Top 0.5: R77.2 61.5,13.5 62.5,14.5 72,14.5 74.5,17 74.5,19.5 74.95,19.95 R71.2
N$101
  Top 0.5: R78.2 61.5,21.5 62.5,22.5 79.5,22.5 81,21 R72.1
N$102
  Top 0.5: C35.1 P5.4
N$103
  Top 0.5: C36.1 P5.5
N$104
  Top 0.5: C37.1 P5.6
N$105
  Top 0.5: C38.1 P5.7
N$106
  Top 0.5: R81.1 79.5,34 80.4,33.1 Q18.3 | R89.1 85,34 84.1,33.1 Q18.3 | Q18.3 TP30.1
N$107  (via drill 0.5)
  Top 0.5: R90.1 Q16.3 79.9,41.1 v81.5,39.5 | C45.2 v89.5,40
  Bottom 0.5: v81.5,39.5 89,39.5 v89.5,40 92.64,43.14 92.64,44.85 94.29,46.5 TP28.1
N$108
  Top 0.5: R81.2 79.45,37 Q16.2
N$109
  Top 0.5: R89.2 84.95,37 Q17.2
N$110
  Top 0.5: R91.1 83.5,42 84,41.5 Q17.3 90.65,41.1 C46.2 92.05,44.55 92.5,45 TP29.1
N$111
  Top 0.5: Q18.2 82.95,30.05 83.55,29.45 R92.2
N$112
  Top 0.5: R83.1 R95.3
N$113
  Top 0.5: R84.2 60,27 59,28 R95.1
N$114
  Top 0.5: R95.2 61.5,31 62.5,32 78.5,32 79.6,30.9 Q18.1
N$115
  Top 0.5: R87.1 76,41.5 77.55,39.95 Q16.1 77.5,38.85 | C43.2 88,35 85,32 80,32 77.5,34.5 77.5,38.85 | TP26.1 77.35,39 77.5,38.85
N$116
  Top 0.5: Q17.1 83.05,39.95 | R88.2 81,42 83.05,39.95 | C44.2 89.5,37.5 | 89.5,37.5 87,40 83.1,40 83.05,39.95 | TP27.1 89,37.5 89.5,37.5
N$117
  Top 0.5: R94.3 R85.1
N$118
  Top 0.5: R86.2 60,42.5 59,43.5 R94.1
N$119
  Top 0.5: R93.3 R96.1
N$120
  Top 0.5: R82.2 60,34.5 59,35.5 R93.1
N$121
  Top 0.5: R93.2 61.5,38.5 62.5,39.5 72,39.5 74.5,42 74.5,44.5 74.95,44.95 R87.2
N$122
  Top 0.5: R94.2 61.5,46.5 62.5,47.5 79.5,47.5 81,46 R88.1
N$123
  Top 0.5: C43.1 P6.4
N$124
  Top 0.5: C44.1 P6.5
N$125
  Top 0.5: C45.1 P6.6
N$126
  Top 0.5: C46.1 P6.7
N$127
  Top 0.5: R97.1 79.5,59 80.4,58.1 Q21.3 | R105.1 85,59 84.1,58.1 Q21.3 | Q21.3 TP35.1
N$128  (via drill 0.5)
  Top 0.5: R106.1 Q19.3 79.9,66.1 v81.5,64.5 | C53.2 v89.5,65
  Bottom 0.5: v81.5,64.5 89,64.5 v89.5,65 92.64,68.14 92.64,69.85 94.29,71.5 TP33.1
N$129
  Top 0.5: R97.2 79.45,62 Q19.2
N$130
  Top 0.5: R105.2 84.95,62 Q20.2
N$131
  Top 0.5: R107.1 83.5,67 84,66.5 Q20.3 90.65,66.1 C54.2 92.05,69.55 92.5,70 TP34.1
N$132
  Top 0.5: Q21.2 82.95,55.05 83.55,54.45 R108.2
N$133
  Top 0.5: R99.1 R111.3
N$134
  Top 0.5: R100.2 60,52 59,53 R111.1
N$135
  Top 0.5: R111.2 61.5,56 62.5,57 78.5,57 79.6,55.9 Q21.1
N$136
  Top 0.5: R103.1 76,66.5 77.55,64.95 Q19.1 77.5,63.85 | C51.2 88,60 85,57 80,57 77.5,59.5 77.5,63.85 | TP31.1 77.35,64 77.5,63.85
N$137
  Top 0.5: Q20.1 83.05,64.95 | R104.2 81,67 83.05,64.95 | C52.2 89.5,62.5 | 89.5,62.5 87,65 83.1,65 83.05,64.95 | TP32.1 89,62.5 89.5,62.5
N$138
  Top 0.5: R110.3 R101.1
N$139
  Top 0.5: R102.2 60,67.5 59,68.5 R110.1
N$140
  Top 0.5: R109.3 R112.1
N$141
  Top 0.5: R98.2 60,59.5 59,60.5 R109.1
N$142
  Top 0.5: R109.2 61.5,63.5 62.5,64.5 72,64.5 74.5,67 74.5,69.5 74.95,69.95 R103.2
N$143
  Top 0.5: R110.2 61.5,71.5 62.5,72.5 79.5,72.5 81,71 R104.1
N$144
  Top 0.5: C51.1 P7.4
N$145
  Top 0.5: C52.1 P7.5
N$146
  Top 0.5: C53.1 P7.6
N$147
  Top 0.5: C54.1 P7.7
N$148
  Top 0.5: R113.1 79.5,84 80.4,83.1 Q24.3 | R121.1 85,84 84.1,83.1 Q24.3 | Q24.3 TP40.1
N$149  (via drill 0.5)
  Top 0.5: R122.1 Q22.3 79.9,91.1 v81.5,89.5 | C61.2 v89.5,90
  Bottom 0.5: v81.5,89.5 89,89.5 v89.5,90 92.64,93.14 92.64,94.85 94.29,96.5 TP38.1
N$150
  Top 0.5: R113.2 79.45,87 Q22.2
N$151
  Top 0.5: R121.2 84.95,87 Q23.2
N$152
  Top 0.5: R123.1 83.5,92 84,91.5 Q23.3 90.65,91.1 C62.2 92.05,94.55 92.5,95 TP39.1
N$153
  Top 0.5: Q24.2 82.95,80.05 83.55,79.45 R124.2
N$154
  Top 0.5: R115.1 R127.3
N$155
  Top 0.5: R116.2 60,77 59,78 R127.1
N$156
  Top 0.5: R127.2 61.5,81 62.5,82 78.5,82 79.6,80.9 Q24.1
N$157
  Top 0.5: R119.1 76,91.5 77.55,89.95 Q22.1 77.5,88.85 | C59.2 88,85 85,82 80,82 77.5,84.5 77.5,88.85 | TP36.1 77.35,89 77.5,88.85
N$158
  Top 0.5: Q23.1 83.05,89.95 | R120.2 81,92 83.05,89.95 | C60.2 89.5,87.5 | 89.5,87.5 87,90 83.1,90 83.05,89.95 | TP37.1 89,87.5 89.5,87.5
N$159
  Top 0.5: R126.3 R117.1
N$160
  Top 0.5: R118.2 60,92.5 59,93.5 R126.1
N$161
  Top 0.5: R125.3 R128.1
N$162
  Top 0.5: R114.2 60,84.5 59,85.5 R125.1
N$163
  Top 0.5: R125.2 61.5,88.5 62.5,89.5 72,89.5 74.5,92 74.5,94.5 74.95,94.95 R119.2
N$164
  Top 0.5: R126.2 61.5,96.5 62.5,97.5 79.5,97.5 81,96 R120.1
N$165
  Top 0.5: C59.1 P8.4
N$166
  Top 0.5: C60.1 P8.5
N$167
  Top 0.5: C61.1 P8.6
N$168
  Top 0.5: C62.1 P8.7
V+  (via drill 0.5)
  Top 0.5: P1.2 41.1,5 C8.+ 39.5,4.9 | C7.+ 39.5,4.9 | 39.5,4.9 v39.5,6.5 | v22,4.5 R11.2 | v22,12 R9.2 | v22,20 R13.2 | v28.5,21.5 R3.2 | v33.5,21.5 R4.2 C2.1 C1.1
  Bottom 0.5: v39.5,6.5 37.5,4.5 v22,4.5 v22,12 v22,20 23.5,21.5 v28.5,21.5 v33.5,21.5
V+1  (via drill 0.5)
  Top 0.5: P2.2 41.1,30 C16.+ 39.5,29.9 | C15.+ 39.5,29.9 | 39.5,29.9 v39.5,31.5 | v22,29.5 R19.2 | v22,37 R32.2 | v22,45 R21.2 | v28.5,46.5 R26.2 | v33.5,46.5 R27.2 C10.1 C9.1
  Bottom 0.5: v39.5,31.5 37.5,29.5 v22,29.5 v22,37 v22,45 23.5,46.5 v28.5,46.5 v33.5,46.5
V+2  (via drill 0.5)
  Top 0.5: P3.2 41.1,55 C24.+ 39.5,54.9 | C23.+ 39.5,54.9 | 39.5,54.9 v39.5,56.5 | v22,54.5 R35.2 | v22,62 R48.2 | v22,70 R37.2 | v28.5,71.5 R42.2 | v33.5,71.5 R43.2 C18.1 C17.1
  Bottom 0.5: v39.5,56.5 37.5,54.5 v22,54.5 v22,62 v22,70 23.5,71.5 v28.5,71.5 v33.5,71.5
V+3  (via drill 0.5)
  Top 0.5: P4.2 41.1,80 C32.+ 39.5,79.9 | C31.+ 39.5,79.9 | 39.5,79.9 v39.5,81.5 | v22,79.5 R51.2 | v22,87 R64.2 | v22,95 R53.2 | v28.5,96.5 R58.2 | v33.5,96.5 R59.2 C26.1 C25.1
  Bottom 0.5: v39.5,81.5 37.5,79.5 v22,79.5 v22,87 v22,95 23.5,96.5 v28.5,96.5 v33.5,96.5
V+4  (via drill 0.5)
  Top 0.5: P5.2 91.1,5 C40.+ 89.5,4.9 | C39.+ 89.5,4.9 | 89.5,4.9 v89.5,6.5 | v72,4.5 R67.2 | v72,12 R80.2 | v72,20 R69.2 | v78.5,21.5 R74.2 | v83.5,21.5 R75.2 C34.1 C33.1
  Bottom 0.5: v89.5,6.5 87.5,4.5 v72,4.5 v72,12 v72,20 73.5,21.5 v78.5,21.5 v83.5,21.5
V+5  (via drill 0.5)
  Top 0.5: P6.2 91.1,30 C48.+ 89.5,29.9 | C47.+ 89.5,29.9 | 89.5,29.9 v89.5,31.5 | v72,29.5 R83.2 | v72,37 R96.2 | v72,45 R85.2 | v78.5,46.5 R90.2 | v83.5,46.5 R91.2 C42.1 C41.1
  Bottom 0.5: v89.5,31.5 87.5,29.5 v72,29.5 v72,37 v72,45 73.5,46.5 v78.5,46.5 v83.5,46.5
V+6  (via drill 0.5)
  Top 0.5: P7.2 91.1,55 C56.+ 89.5,54.9 | C55.+ 89.5,54.9 | 89.5,54.9 v89.5,56.5 | v72,54.5 R99.2 | v72,62 R112.2 | v72,70 R101.2 | v78.5,71.5 R106.2 | v83.5,71.5 R107.2 C50.1 C49.1
  Bottom 0.5: v89.5,56.5 87.5,54.5 v72,54.5 v72,62 v72,70 73.5,71.5 v78.5,71.5 v83.5,71.5
V+7  (via drill 0.5)
  Top 0.5: P8.2 91.1,80 C64.+ 89.5,79.9 | C63.+ 89.5,79.9 | 89.5,79.9 v89.5,81.5 | v72,79.5 R115.2 | v72,87 R128.2 | v72,95 R117.2 | v78.5,96.5 R122.2 | v83.5,96.5 R123.2 C58.1 C57.1
  Bottom 0.5: v89.5,81.5 87.5,79.5 v72,79.5 v72,87 v72,95 73.5,96.5 v78.5,96.5 v83.5,96.5

## Text on the board
_tNames: R7 | R7 | R15 | R3 | R16 | R4 | C2 | C1 | R15 | R3 | R16 | R4 | C2 | C1 | R13 | TP4 | TP3 | R13 | TP4 | TP3 | R14 | C6 | R14 | C6 | Q1 | Q2 | Q1 | Q2 | C5 | C5 | R6 | R6 | TP1 | TP2 | C4 | TP1 | TP2 | C4 | R9 | R9 | TP5 | TP5 | C3 | C3 | R10 | R1 | R2 | R10 | R1 | R2 | Q3 | Q3 | R8 | C7 | C8 | R8 | C7 | C8 | R5 | R5 | R11 | R11 | R12 | R12 | R7 | R7 | R15 | R3 | R16 | R4 | C2 | C1 | R15 | R3 | R16 | R4 | C2 | C1 | R13 | TP4 | TP3 | R13 | TP4 | TP3 | R14 | C6 | R14 | C6 | Q1 | Q2 | Q1 | Q2 | C5 | C5 | R6 | R6 | R9 | TP1 | TP2 | C4 | R9 | TP1 | TP2 | C4 | TP5 | TP5 | C3 | C3 | R10 | R1 | R2 | R10 | R1 | R2 | Q3 | Q3 | R8 | C7 | C8 | R8 | C7 | C8 | R5 | R5 | R11 | R11 | R12 | R12 | R7 | R7 | R15 | R3 | R16 | R4 | C2 | C1 | R15 | R3 | R16 | R4 | C2 | C1 | R13 | TP4 | TP3 | R13 | TP4 | TP3 | R14 | C6 | R14 | C6 | Q1 | Q2 | Q1 | Q2 | C5 | C5 | R6 | R6 | TP1 | TP2 | C4 | TP1 | TP2 | C4 | R9 | R9 | TP5 | TP5 | C3 | C3 | R10 | R1 | R2 | R10 | R1 | R2 | Q3 | Q3 | R8 | C7 | C8 | R8 | C7 | C8 | R5 | R5 | R11 | R11 | R12 | R12 | R7 | R7 | R15 | R3 | R16 | R4 | C2 | C1 | R15 | R3 | R16 | R4 | C2 | C1 | R13 | TP4 | TP3 | R13 | TP4 | TP3 | R14 | C6 | R14 | C6 | Q1 | Q2 | Q1 | Q2 | C5 | C5 | R6 | R6 | R9 | TP1 | TP2 | C4 | R9 | TP1 | TP2 | C4 | TP5 | TP5 | C3 | C3 | R10 | R1 | R2 | R10 | R1 | R2 | Q3 | Q3 | R8 | C7 | C8 | R8 | C7 | C8 | R5 | R5 | R11 | R11 | R12 | R12